# Altium PCB PCB1.PcbDoc
Units mil, origin at the board's own origin, x right, y up, seen from the top; angles counter-clockwise.
Board outline 6000 x 4000 mil, 2 copper layers (Top Layer, Bottom Layer); 39 components, 29 nets, 162 pads, 0 vias.
Unrouted connection lines stored in the file: 82.
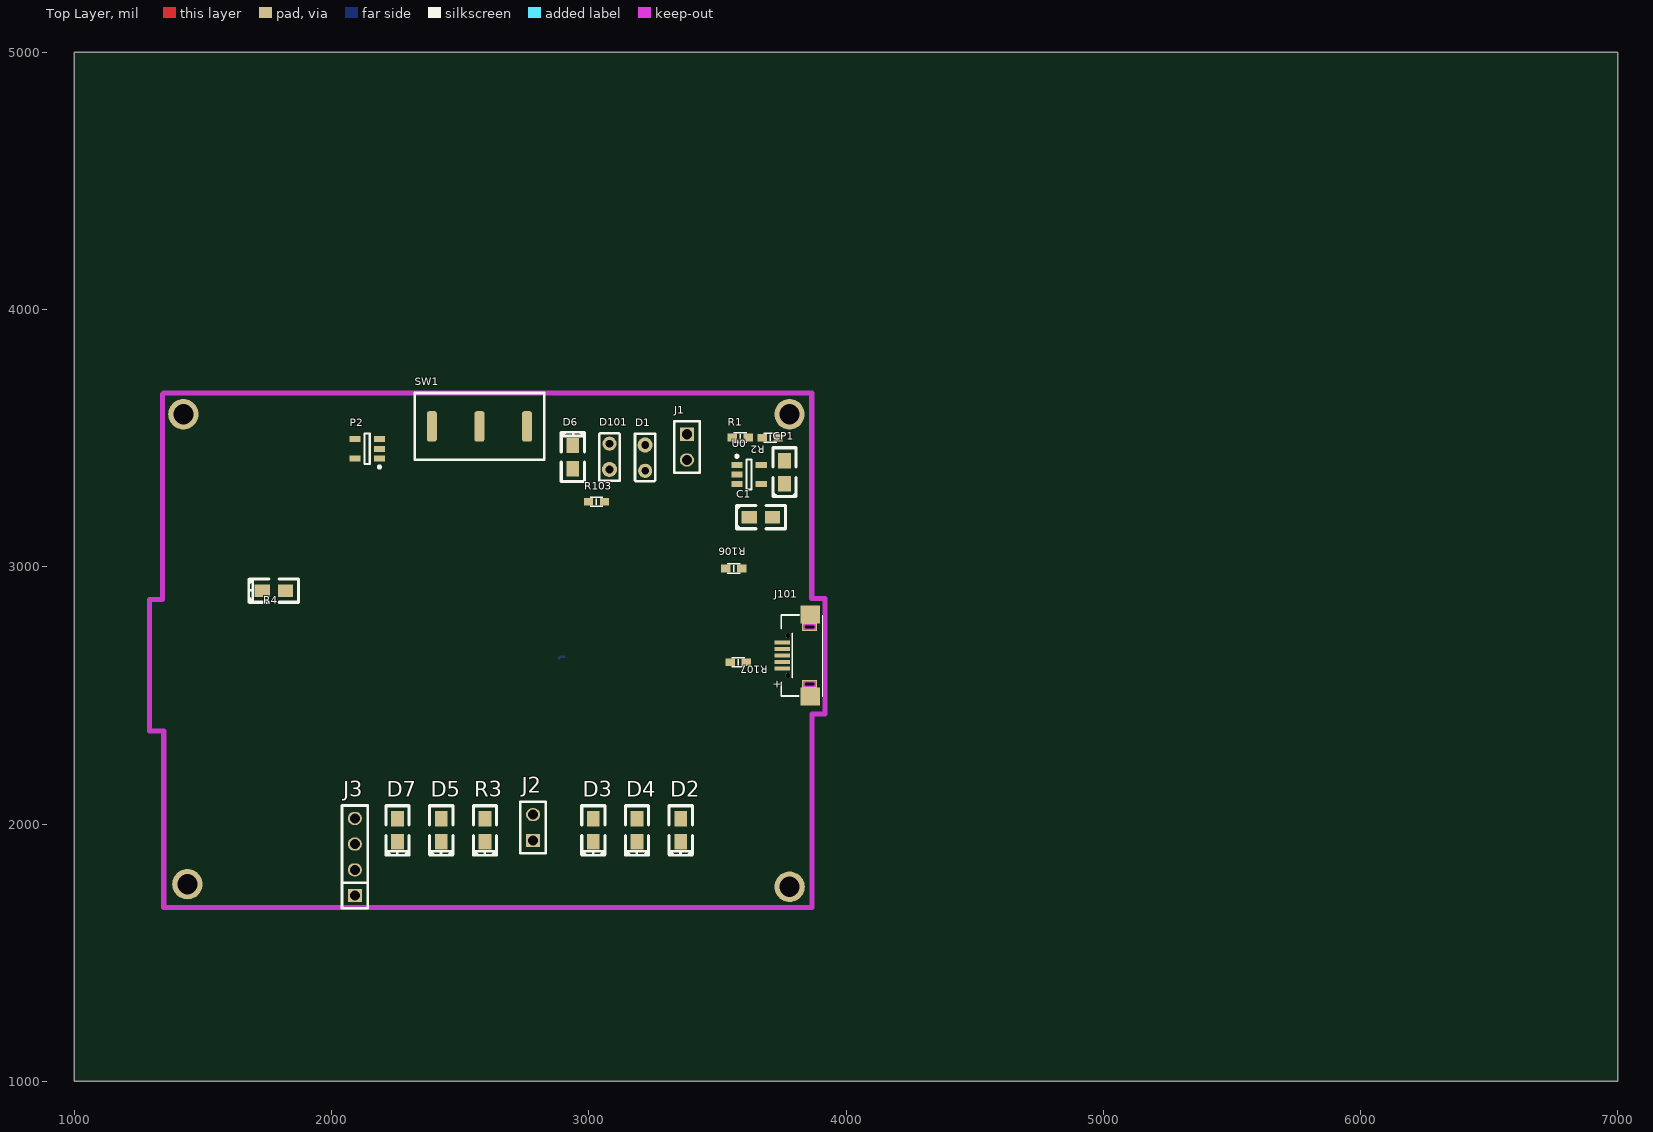
[diagram p0: Top Layer view]
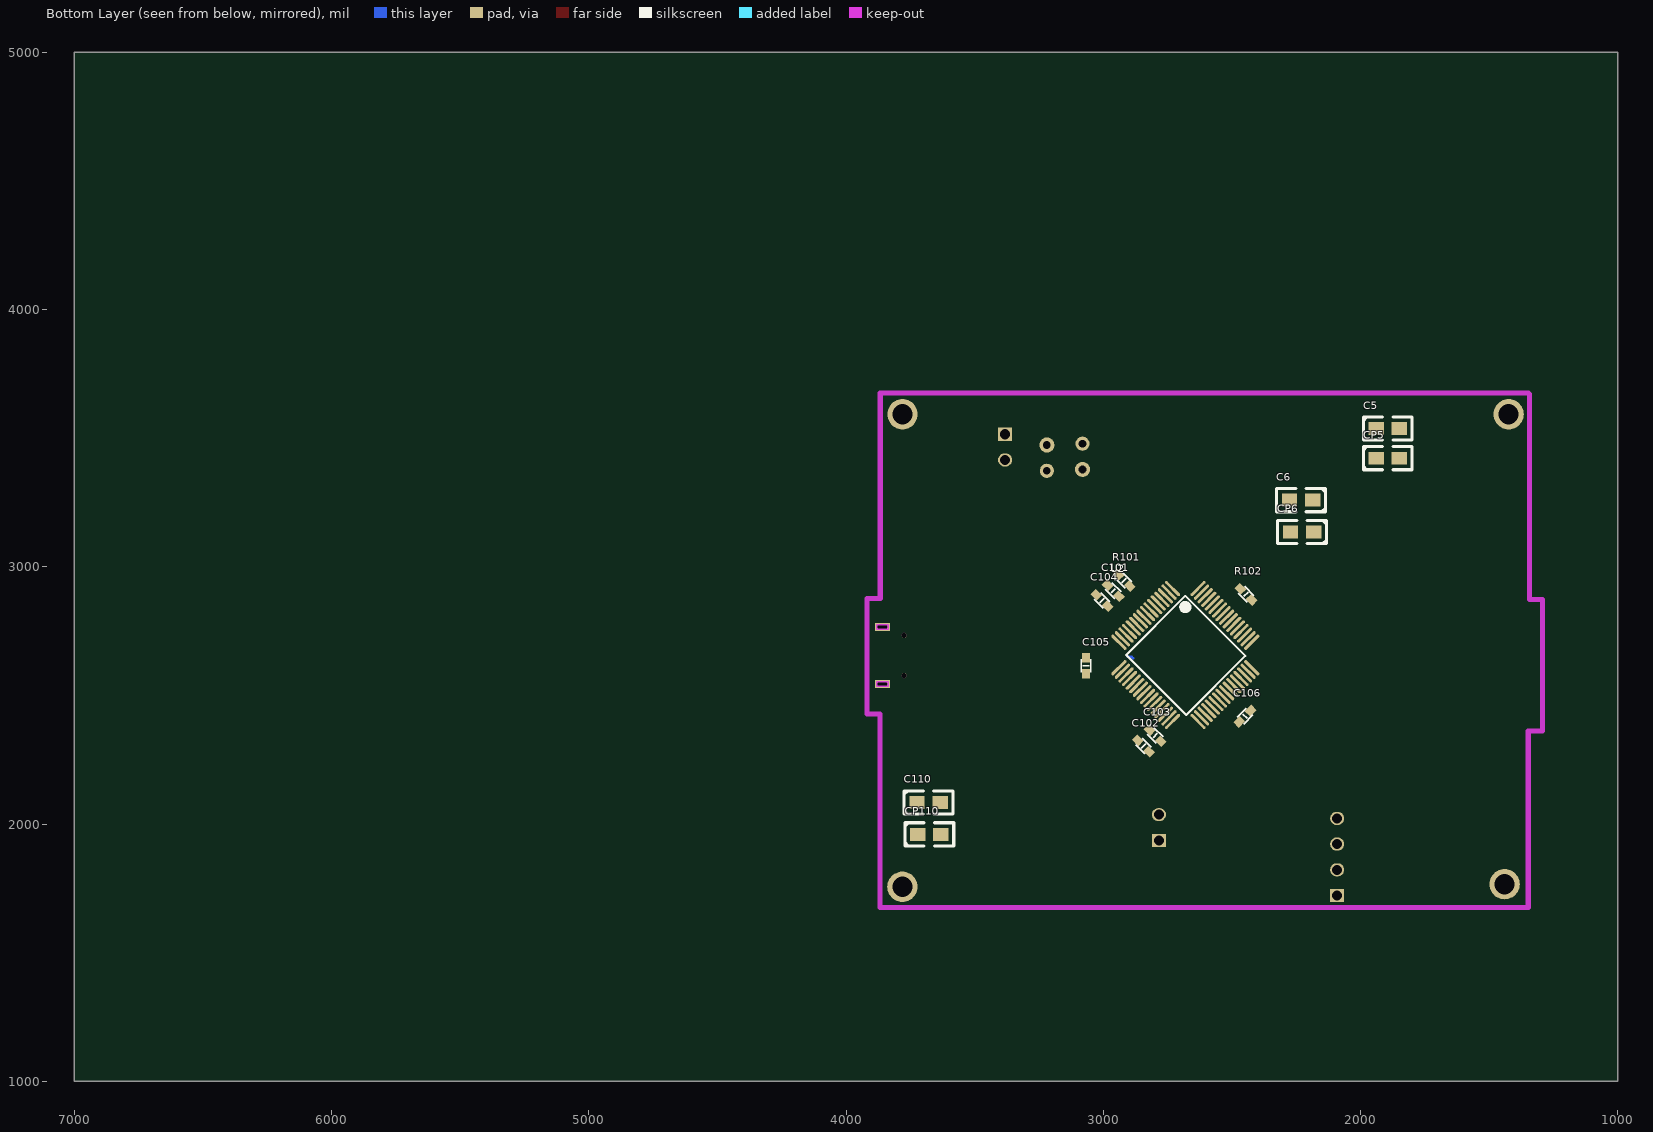
[diagram p1: Bottom Layer view, seen from below]

## Layer stack, top to bottom
Top Solder: solder mask 0.4, Solder Resist, Dk 3.5
Top Layer: signal copper 1.4
Dielectric1: dielectric 12.6, FR-4, Dk 4.8
Bottom Layer: signal copper 1.4
Bottom Solder: solder mask 0.4, Solder Resist, Dk 3.5

## Board outline
1000,1000 7000,1000 7000,5000 1000,5000

## Design rules (kind name [scope] priority, off if disabled: settings)
Clearance Clearance_1 [InPolygon] p1: gap=20
Clearance [All] p2: gap=10
PolygonConnect [All] p1: connectstyle=Direct reliefconductorwidth=10 reliefentries=4 polygonreliefangle="90 Angle" airgapwidth=10
RoutingVias [All] p1: holewidth=28 width=50 viastyle="Through Hole" minholewidth=28 minwidth=50 maxholewidth=28 maxwidth=50
SilkToSolderMaskClearance SilkscreenOverComponentPads [IsPad] p1: minsilkscreentomaskgap=10 clearancetoexposedcopper=TRUE
SolderMaskExpansion [All] p1: expansion=4
Width [All] p1: maxlimit=50 minlimit=6 preferedwidth=10 minimp=50.000000 maximp=50.000000 favimp=50.000000
28 further rules are at their usual default settings.

## Components (designator, comment, footprint, x,y, rotation, side; value= is the part's Value field where it differs from the comment)
C1 "104" 0805 3669.22,3192.73 r0 top
C5 "104" 0805 1894,3537 r180 bottom
C6 "104" 0805 2231,3259 r0 bottom
C101 "104" 0603 2961,2907 r45 bottom
C102 "50V22pF" 0603 2844,2303 r45 bottom
C103 "50V22pF" 0603 2798,2344 r225 bottom
C104 "50V22pF" 0603 3005,2869 r45 bottom
C105 "50V22pF" 0603 3067,2615 r270 bottom
C106 "50V22pF" 0603 2449,2419 r135 bottom
C110 "104" 0805 3679.1,2083.7 r180 bottom
CP1 "1u" 0805 3761.22,3367.73 r90 top
CP5 "1u" 0805 1894,3422 r180 bottom
CP6 "1u" 0805 2227,3135 r0 bottom
CP110 "1u" 0805 3676.1,1959.7 r180 bottom
D1 "LED" LEDDIP 3219.09,3423.14 r90 top
D2 "DIODE" 0805 3357.56,1975.82 r90 top
D3 "DIODE" 0805 3017.63,1975.82 r90 top
D4 "DIODE" 0805 3187.59,1975.82 r90 top
D5 "DIODE" 0805 2426.63,1975.82 r90 top
D6 "DIODE" 0805 2938,3426.45 r270 top
D7 "DIODE" 0805 2256.66,1975.82 r90 top
D101 "LED" LEDDIP 3080.38,3428.51 r270 top
J1 "BAT" SIP2 3381.52,3465.21 r270 top
J2 "CON2" SIP2 2783.43,1986.45 r90 top
J3 "HC-06" SIP4 2090.69,1871.82 r90 top
J101 "Micro_USB" MICRO-USB 3839,2655 r90 top
P2 "SGM2033-3.3V" SOT23-5 2138.69,3458.54 r180 top
R1 "330R" 0603 3589.22,3502.73 r180 top
R2 "330R" 0603 3705.22,3501.73 r180 top
R3 "10K" 0805 2596.6,1975.82 r90 top
R4 "10K" 0805 1776,2907 r0 top
R101 "10K" 0603 2919,2947 r225 bottom
R102 "10K" 0603 2445,2893 r45 bottom
R103 "1K" 0603 3030,3253 r0 top
R106 "1K" 0603 3564,2993 r180 top
R107 "1K" 0603 3581,2629 r180 top
SW1 "SW" SW3 2575.02,3545.68 r0 top
U0 "PW4054" SOT23-5 3623.22,3358.73 r0 top
U2 "STM32F412RGT6" LQFP64 2681,2657 r225 bottom

## Footprints (in the part's own frame and the unit in brackets; to place one, negate y for a bottom-side part, rotate by r counter-clockwise, add the part's x,y. Pads: shape width x height; smd on the part's side, far side on the other; paste and mask are expansions set on the pad)
0603 [mil] "0603"
  rect 36x30 smd: 1(-31,0) 2(31,0)
  silkscreen extent -25,-18 25,18
0805 [mil]
  rect 60x50 smd: 1(-45,0) 2(45,0)
  silkscreen extent -95,-45 95,45
LEDDIP [mm]
  round 1.4 hole 0.762: 1(-1.27,0)
  round 1.5 hole 0.762: 2(1.27,0)
  silkscreen extent -2.3,-1 2.4,1
LQFP64 [mm] "STM32F103RX"
  oval 2x0.3 smd: 1(-5.525,3.75) 2(-5.525,3.25) 3(-5.525,2.75) 4(-5.525,2.25) 5(-5.525,1.75) 6(-5.525,1.25) 7(-5.525,0.75) 8(-5.525,0.25) 9(-5.525,-0.25) 10(-5.525,-0.75) 11(-5.525,-1.25) 12(-5.525,-1.75) 13(-5.525,-2.25) 14(-5.525,-2.75) 15(-5.525,-3.25) 16(-5.525,-3.75) 33(5.525,-3.75) 34(5.525,-3.25) 35(5.525,-2.75) 36(5.525,-2.25) 37(5.525,-1.75) 38(5.525,-1.25) 39(5.525,-0.75) 40(5.525,-0.25) 41(5.525,0.25) 42(5.525,0.75) 43(5.525,1.25) 44(5.525,1.75) 45(5.525,2.25) 46(5.525,2.75) 47(5.525,3.25) 48(5.525,3.75)
  oval 0.3x2 smd: 17(-3.75,-5.525) 18(-3.25,-5.525) 19(-2.75,-5.525) 20(-2.25,-5.525) 21(-1.75,-5.525) 22(-1.25,-5.525) 23(-0.75,-5.525) 24(-0.25,-5.525) 25(0.25,-5.525) 26(0.75,-5.525) 27(1.25,-5.525) 28(1.75,-5.525) 29(2.25,-5.525) 30(2.75,-5.525) 31(3.25,-5.525) 32(3.75,-5.525) 49(3.75,5.525) 50(3.25,5.525) 51(2.75,5.525) 52(2.25,5.525) 53(1.75,5.525) 54(1.25,5.525) 55(0.75,5.525) 56(0.25,5.525) 57(-0.25,5.525) 58(-0.75,5.525) 59(-1.25,5.525) 60(-1.75,5.525) 61(-2.25,5.525) 62(-2.75,5.525) 63(-3.25,5.525) 64(-3.75,5.525)
  silkscreen extent -4.13,-4.12 4.25,4.13
MICRO-USB [mm]
  rect 0.4x1.55 smd: 1(-1.3,2.2) 2(-0.65,2.2) 3(0,2.2) 4(0.65,2.2) 5(1.3,2.2)
  rect 1.8x1.9 smd: 6(-4.05,-0.55) 6(4.05,-0.55)
  rect 0.8x1.5 hole 0.4 slot 1 at 90 deg: 6(-2.825,-0.5) 6(2.825,-0.5)
  round 0.5 hole 0.5 unplated: ""(-2,1.65) ""(2,1.65)
  Keep-Out Layer lines w0.127: -3.054,0.075 -3.054,-1.043 -2.596,-1.043 -2.596,0.075 -3.054,0.075 ; 2.596,0.075 2.596,-1.043 3.054,-1.043 3.054,0.075 2.596,0.075
  silkscreen extent -4.05,-1.8 4,2.3
SIP2 [mm]
  rect 1.3x1.4 hole 1: 1(-1.27,0)
  oval 1.3x1.4 hole 1: 2(1.27,0)
  silkscreen extent -2.54,-1.27 2.54,1.27
SIP4 [mm]
  rect 1.3x1.4 hole 1: 1(-3.81,0)
  oval 1.3x1.4 hole 1: 2(-1.27,0) 3(1.27,0) 4(3.81,0)
  silkscreen extent -5.08,-1.27 5.08,1.27
SOT23-5 [mm] "SOT23, 5-Leads, Body 3.0x3.0mm (max), Pitch 0.95mm, IPC Medium Density"
  rect 1.1x0.6 smd: 1(-1.2,0.95) 2(-1.2,0) 3(-1.2,-0.95) 4(1.2,-0.95) 5(1.2,0.95)
  silkscreen extent -1.33,-1.5 0.25,1.92
SW3 [mm]
  rrect50% 1x3 smd: 1(-4.7,0) 2(0,0) 3(4.7,0)
  silkscreen extent -6.4,-3.3 6.4,3.3

## Part data
C1 C101 C110: library part CAP, "CAP"
C5 C6: library part CAP, "1uF"
C102 C103 C104 C105 C106: library part Cap1, "Capacitor"
CP1 CP5 CP6 CP110: library part CAP+, "CAP+"
D1 D101: library part LAMP, "LAMP"
J1: library part CON2, "Conjunctor"
J2: "Conjunctor"
J3: library part CON4, "CON4"
P2: library part SGM2033
R1 R2 R3 R4 R103 R106 R107: library part RES, "RES"
R101: library part RESISTANCE, "RES"
R102: library part R

## Free pads (board coordinates)
  round 118.11 hole 78.74: 3(3780.34,3592.95) 4(1424.13,3592.95) 8(1439.73,1766.14) 8(3780.72,1755.84)

## Nets (pads, with @x,y where several pads share a name; then routed paths per layer and width w, separated by ;. In a path a pad name is that pad's centre, name@x,y a point inside that pad or via, vN(x,y) a via of type N, cw(c..) or ccw(c..) an arc to the next point about the centre after c; other vN are vias at no path point)
+5V: C5.1 CP5.1 P2.1 P2.3 SW1.2
/RST: C101.1 R101.2 U2.7
BAT: J1.1 SW1.3 U0.3
BOOT0: R102.1 U2.60
GND: C1.2 C5.2 C6.2 C101.2 C102.2 C103.2 C104.2 C105.1 C106.1 C110.2 CP1.2 CP5.2 CP6.2 CP110.2 D3.1 D5.1 D7.1 J1.2 J101.5 P2.2 R2.1 R4.2 R102.2 U0.2 U2.12 U2.18 U2.28 U2.31 U2.47 U2.63
LAMP: R103.1 U2.62
M\S\S\: U2.20
MCLK: U2.21
MI: U2.22
MO: U2.23
NetD1_2: D1.2 R1.1
NetD3_2: D3.2 D4.1 J2.1
NetD4_2: D4.2 D6.2 R3.2
NetD5_2: D5.2 D6.1 J2.2
NetD101_2: D101.2 R103.2
NetJ101_2: J101.2 R107.1
NetJ101_6: J101.6 R106.1
NetR1_2: R1.2 U0.1
NetR2_2: R2.2 U0.5
POWER: C1.1 CP1.1 D1.1 J101.1 U0.4
PRESS: D2.1 D7.2 R3.1 R4.1 U2.15
RXD1: J101.3 U2.43
RXD2: U2.17
SWCLK: J101.4 U2.49
SWDIO: R106.2 U2.46
TXD1: R107.2 U2.42
TXD2: U2.16
VCAP: C103.1 U2.30
VCC: C6.1 C102.1 C104.1 C105.2 C106.2 C110.1 CP6.1 CP110.1 D2.2 D101.1 P2.5 R101.1 U2.1 U2.13 U2.19 U2.32 U2.48 U2.64
pads on no net: J3.1 J3.2 J3.3 J3.4 J101. P2.4 SW1.1 U2.2 U2.3 U2.4 U2.5 U2.6 U2.8 U2.9 U2.10 U2.11 U2.14 U2.24 U2.25 U2.26 U2.27 U2.29 U2.33 U2.34 U2.35 U2.36 U2.37 U2.38 U2.39 U2.40 U2.41 U2.44 U2.45 U2.50 U2.51 U2.52 U2.53 U2.54 U2.55 U2.56 U2.57 U2.58 U2.59 U2.61
copper on no net: | length 22.9
  Bottom Layer w10: 2884,2644 2891,2651 2904,2651

## Keep-outs
Keep-Out Layer:
  lines w20: 1343.3,3670.8 1343.3,2873.13 1292.3,2873.13 1292.3,2362.12 1347.5,2362.12 1347.5,1675 3868,1675 3868,2427.32 3919,2427.32 3919,2876 3867,2876 3867,3675 1347.5,3675

## Text inside footprints (layer, text, board x,y; h text height)
J101: Top Overlay "+" at 3746.48,2525.08 h30 r90